# EAGLE board coin_panel (EAGLE 7.4.0)

Size 40 x 25 mm. Coordinates in mm from the lower left corner, seen from the top.
Outline: 0,0 40,0 40,25 0,25 0,0
Copper layers used: 
Design rules "default": track to track 8mil

## Footprints (pad centres in the part's own frame; a part is rotated, then mirrored left to right if it is on the bottom)
0402 = smd 0.6 x 0.6: 1 -0.5,0; 2 0.5,0
0603 = smd 0.9 x 0.9: 1 -0.8,0; 2 0.8,0

## Placement (x,y rotation side)
A1_C1  100n  [0402]  3,3 0 top
A1_R1  10k  [0603]  7,3 0 top
A1_R2  1k  [0603]  5,7 0 top
A2_C1  100n  [0402]  18,3 0 top
A2_R1  10k  [0603]  22,3 0 top
A2_R2  1k  [0603]  20,7 0 top
A3_C1  100n  [0402]  33,3 0 top
A3_R1  10k  [0603]  37,3 0 top
A3_R2  1k  [0603]  35,7 0 top
B1_C1  100n  [0402]  3,18 0 top
B1_R1  10k  [0603]  7,18 0 top
B1_R2  1k  [0603]  5,22 0 top
B2_C1  100n  [0402]  18,18 0 top
B2_R1  10k  [0603]  22,18 0 top
B2_R2  1k  [0603]  20,22 0 top
B3_C1  100n  [0402]  33,18 0 top
B3_R1  10k  [0603]  37,18 0 top
B3_R2  1k  [0603]  35,22 0 top

## Library data of the parts
A1_C1 A1_R1 A1_R2 A2_C1 A2_R1 A2_R2 A3_C1 A3_R1 A3_R2 B1_C1 B1_R1 B1_R2 B2_C1 B2_R1 B2_R2 B3_C1 B3_R1 B3_R2 = smd-lib